# Altium PCB CME-USB-JTAG_Lite.PcbDoc
Units mil, origin at the board's own origin, x right, y up, seen from the top; angles counter-clockwise.
Board outline 2467 x 1344 mil, 2 copper layers (Top Layer, Bottom Layer); 46 components, 36 nets, 235 pads, 60 vias.
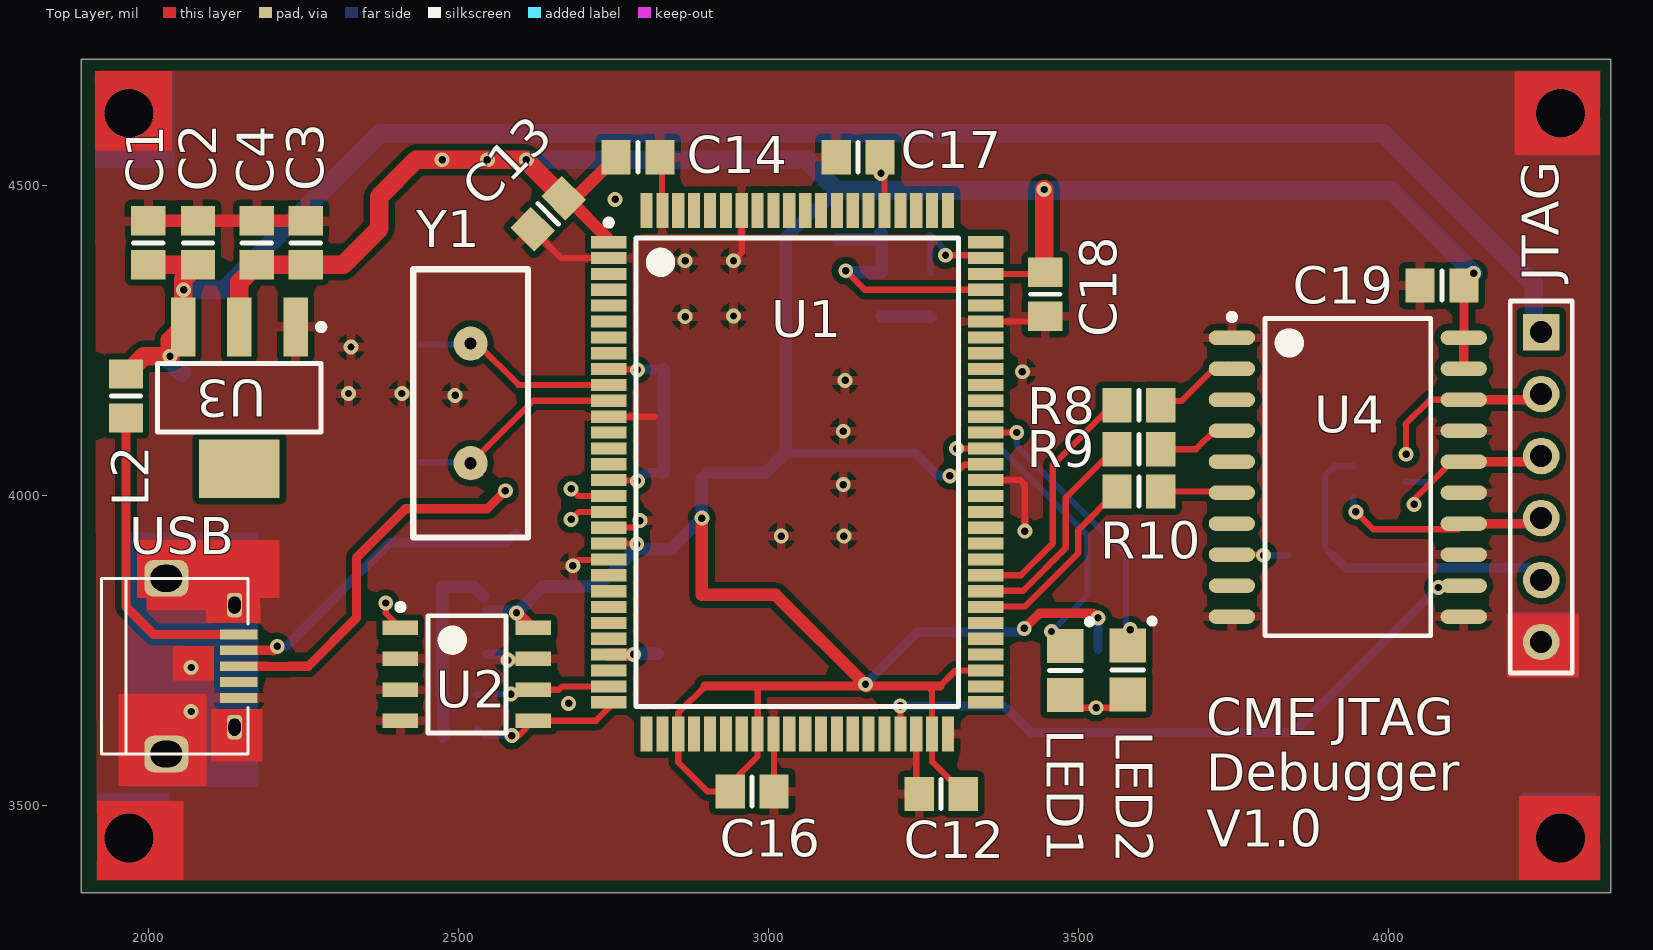
[diagram p0: Top Layer view]
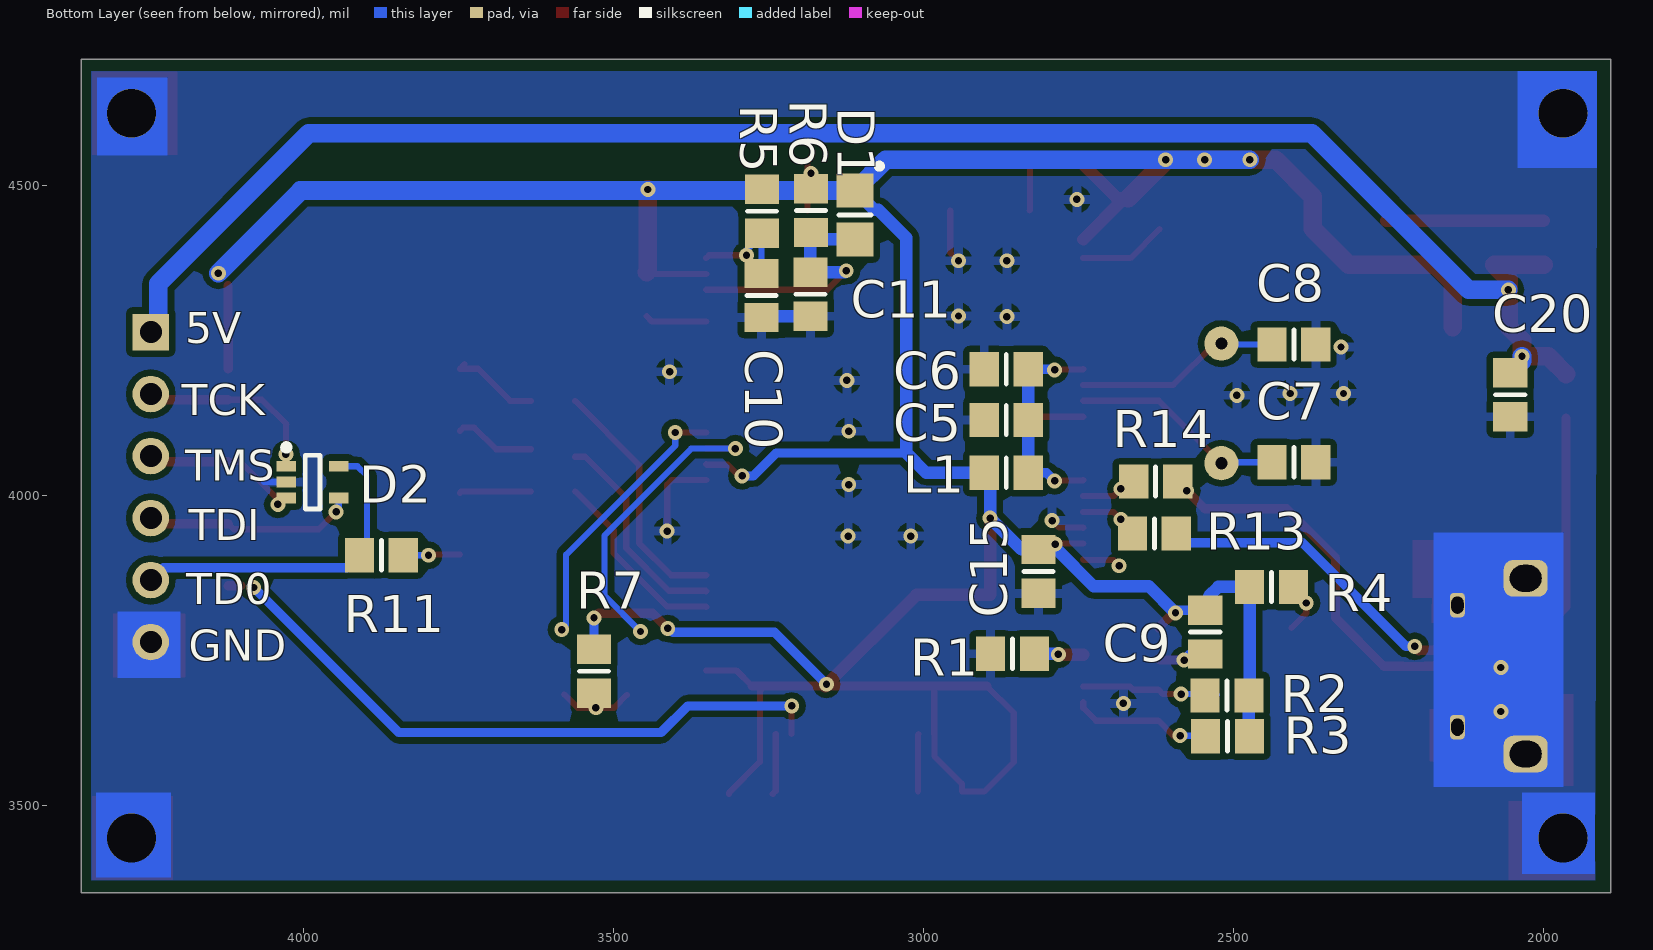
[diagram p1: Bottom Layer view, seen from below]

## Layer stack, top to bottom
Top Solder: solder mask 0.4, Solder Resist, Dk 3.5
Top Layer: signal copper 1.4
Dielectric 1: dielectric 12.6, FR-4, Dk 4.8
Bottom Layer: signal copper 1.4
Bottom Solder: solder mask 0.4, Solder Resist, Dk 3.5

## Board outline
1891,3360 4358,3360 4358,4704 1891,4704

## Design rules (kind name [scope] priority, off if disabled: settings)
Clearance [All] p1: gap=10 ignorepadtopadclearanceinfootprint=FALSE except(0: Arc-Hole Track-Hole SMDPad-Hole THPad-Hole Via-Hole Fill-Hole Poly-Hole Region-Hole Text-Hole)
DiffPairsRouting [All] p1: maxlimit=10 minlimit=10 mostfreqgap=10 toplayer_minwidth=10 toplayer_maxwidth=15 toplayer_prefwidth=15 bottomlayer_minwidth=10 bottomlayer_maxwidth=15 bottomlayer_prefwidth=15 maxuncoupledlength=500
PolygonConnect [All] p1: connectstyle=Relief reliefconductorwidth=15 reliefentries=4 polygonreliefangle="90 Angle" airgapwidth=10
RoutingVias [All] p1: holewidth=28 width=50 viastyle="Through Hole" minholewidth=28 minwidth=50 maxholewidth=28 maxwidth=50
SolderMaskExpansion [All] p1: expansion=4
Width [All] p1: maxlimit=50 minlimit=10 preferedwidth=10
29 further rules are at their usual default settings.

## Classes and differential pairs
differential pair USB-D: +USB-D_P -USB-D_N
differential pair USB: +USB_P -USB_N

## Components (designator, comment, footprint, x,y, rotation, side; value= is the part's Value field where it differs from the comment)
C1 "Cap" 6-0805_N 1999,4408 r270 top
C2 "Cap" 6-0805_N 2079,4408 r270 top
C3 "Cap" 6-0805_N 2253,4408 r270 top
C4 "Cap" 6-0805_N 2174,4408 r270 top
C5 "Cap" 6-0805_N 2866,4122 r180 bottom
C6 "Cap" 6-0805_N 2866,4204 r180 bottom
C7 "Cap" 6-0805_N 2402,4054 r0 bottom
C8 "Cap" 6-0805_N 2402,4244 r0 bottom
C9 "Cap" 6-0805_N 2545,3780 r270 bottom
C10 "Cap" 6-0805_N 3261,4323 r90 bottom
C11 "Cap" 6-0805_N 3182,4325 r90 bottom
C12 "Cap" 6-0805_N 3278,3519 r0 top
C13 "Cap" 6-0805_N 2644,4455 r45 top
C14 "Cap" 6-0805_N 2789,4546 r180 top
C15 "Cap" 6-0805_N 2814,3878 r90 bottom
C16 "Cap" 6-0805_N 2973,3523 r180 top
C17 "Cap" 6-0805_N 3144,4546 r0 top
C18 "Cap" 6-0805_N 3446,4325 r90 top
C19 "Cap" 6-0805_N 4086,4339 r0 top
C20 "Cap" 6-0805_N 2053,4163 r270 bottom
D1 "IN4148" 6-0805_Diode 3110,4453 r90 bottom
D2 "PESDXV4UG" SOT5N-65P210X110 3985,4022 r180 bottom
JTAG "Header 6" HDR1X6 4246,4264 r270 top
L1 "Inductor" 6-0805_N 2866,4037 r180 bottom
L2 "Inductor" 6-0805_N 1963,4161 r270 top
LED1 "LED2" 6-0805_Diode 3478,3718 r90 top
LED2 "LED2" 6-0805_Diode 3579,3719 r90 top
R1 "Res3" 6-0805_N 2856,3745 r180 bottom
R2 "Res3" 6-0805_N 2510,3678 r180 bottom
R3 "Res3" 6-0805_N 2509,3612 r180 bottom
R4 "Res3" 6-0805_N 2438,3853 r0 bottom
R5 "Res3" 6-0805_N 3260,4459 r270 bottom
R6 "Res3" 6-0805_N 3181,4460 r270 bottom
R7 "Res3" 6-0805_N 3531,3717 r90 bottom
R8 "Res3" 6-0805_N 3597,4146 r0 top
R9 "Res3" 6-0805_N 3597,4075 r0 top
R10 "Res3" 6-0805_N 3597,4007 r0 top
R11 "Res3" 6-0805_N 3874,3904 r180 bottom
R13 "Res3" 6-0805_N 2627,3939 r180 bottom
R14 "Res3" 6-0805_N 2625,4023 r180 bottom
U1 "CY7C68013A-100AXC" TQFP100N-65P1600X2200X160 3045.87,4038 r0 top locked
U2 "24LC64" SOP8N-127P600X200 2513,3712 r0 top
U3 "LM1117-3.3" SOT223_N 2146,4158 r270 top
U4 "74LVC244" SOP20N-127P1030X265 3934,4030 r0 top
USB "Header 9" MicroUSB 2049.43,3737.43 r90 top
Y1 "24MHZ" XTAL 2519,4149 r270 top

## Footprints (in the part's own frame and the unit in brackets; to place one, negate y for a bottom-side part, rotate by r counter-clockwise, add the part's x,y. Pads: shape width x height; smd on the part's side, far side on the other; paste and mask are expansions set on the pad)
6-0805_Diode [mm] "Chip Resistor, Body 2.0x1.2mm, IPC Low Density"
  rect 1.4x1.5 smd: 1(-1,0) 2(1,0)
  silkscreen extent 0,-1.1 2.1,0.65, body extent -1.07,-0.7 1.07,0.7, height 0.7
6-0805_N [mm] "Chip Resistor, Body 2.0x1.2mm, IPC Medium Density"
  rect 1.2x1.4 smd: 1(-0.9,0) 2(0.9,0)
  silkscreen extent 0,-0.6 0,0.6, body extent -1.07,-0.7 1.07,0.7, height 0.7
HDR1X6 [mm] "Connector; Header; 6 Position"
  rect 1.5x1.5 hole 0.9: 1(0,0)
  round 1.5 hole 0.9: 2(2.54,0) 3(5.08,0) 4(7.62,0) 5(10.16,0) 6(12.7,0)
  silkscreen extent -1.27,-1.27 13.97,1.27
MicroUSB [mm]
  round 0.635 on Top Overlay: 0(0.986,-3.776)
  rect 0.4x1.524 smd: 1(0.986,-2.426) 2(0.336,-2.426) 3(-0.314,-2.426) 4(-0.964,-2.426) 5(-1.614,-2.426)
  rrect50% 1.5x1.8 hole 1.1 slot 1.3 at 90 deg: 6(3.286,0.543) 7(-3.911,0.543)
  rrect50% 1x0.6 hole 0.5 slot 0.7 at 0 deg: 8(-2.812,-2.254) 9(2.188,-2.254)
  silkscreen extent -3.91,-2.81 3.29,3.19
SOP8N-127P600X200 [mm] "SOP, 8-Leads, Body 4.90x3.90mm, Pitch 1.27mm, IPC Medium Density"
  rect 1.45x0.6 smd: 1(-2.725,1.905) 2(-2.725,0.635) 3(-2.725,-0.635) 4(-2.725,-1.905) 5(2.725,-1.905) 6(2.725,-0.635) 7(2.725,0.635) 8(2.725,1.905)
  silkscreen extent -2.85,-2.4 1.6,2.88, body extent -2,-2.4 2,2.4, height 2
SOP20N-127P1030X265 [mm] "SOP, 20-Leads, Body 12.80x7.50mm, Pitch 1.27mm, IPC Medium Density"
  oval 1.9x0.6 smd: 1(-4.75,5.715) 2(-4.75,4.445) 3(-4.75,3.175) 4(-4.75,1.905) 5(-4.75,0.635) 6(-4.75,-0.635) 7(-4.75,-1.905) 8(-4.75,-3.175) 9(-4.75,-4.445) 10(-4.75,-5.715) 11(4.75,-5.715) 12(4.75,-4.445) 13(4.75,-3.175) 14(4.75,-1.905) 15(4.75,-0.635) 16(4.75,0.635) 17(4.75,1.905) 18(4.75,3.175) 19(4.75,4.445) 20(4.75,5.715)
  silkscreen extent -4.87,-6.5 3.4,6.69, body extent -3.8,-6.5 3.8,6.5, height 2.65
SOT5N-65P210X110 [mm] "SOT353, 5-Leads, Body 2.00x2.10mm, Pitch 0.65mm, IPC Medium Density"
  rect 0.8x0.45 smd: 1(-1.075,0.65) 2(-1.075,0) 3(-1.075,-0.65) 4(1.075,-0.65) 5(1.075,0.65)
  silkscreen extent -1.2,-1.1 0.3,1.55, body extent -0.67,-1.1 0.67,1.1, height 1.1
SOT223_N [mm] "SOT223, 4-Leads, Body 6.5x3.5mm, Pitch 2.3mm, Lead Span 7mm, IPC Medium Density"
  rect 2.4x1 smd: 1(-2.9,2.3) 2(-2.9,0) 3(-2.9,-2.3)
  rect 2.4x3.3 smd: 4(2.9,0)
  silkscreen extent -3.02,-3.35 1.4,3.48, body extent -1.85,-3.35 1.85,3.35, height 1.7
TQFP100N-65P1600X2200X160 [mm] "TQFP, 100-Leads, Body 14.00x20.00mm, Pitch 0.65mm, IPC Medium Density"
  rect 1.45x0.5 smd: 1(-7.725,9.425) 2(-7.725,8.775) 3(-7.725,8.125) 4(-7.725,7.475) 5(-7.725,6.825) 6(-7.725,6.175) 7(-7.725,5.525) 8(-7.725,4.875) 9(-7.725,4.225) 10(-7.725,3.575) 11(-7.725,2.925) 12(-7.725,2.275) 13(-7.725,1.625) 14(-7.725,0.975) 15(-7.725,0.325) 16(-7.725,-0.325) 17(-7.725,-0.975) 18(-7.725,-1.625) 19(-7.725,-2.275) 20(-7.725,-2.925) 21(-7.725,-3.575) 22(-7.725,-4.225) 23(-7.725,-4.875) 24(-7.725,-5.525) 25(-7.725,-6.175) 26(-7.725,-6.825) 27(-7.725,-7.475) 28(-7.725,-8.125) 29(-7.725,-8.775) 30(-7.725,-9.425) 51(7.725,-9.425) 52(7.725,-8.775) 53(7.725,-8.125) 54(7.725,-7.475) 55(7.725,-6.825) 56(7.725,-6.175) 57(7.725,-5.525) 58(7.725,-4.875) 59(7.725,-4.225) 60(7.725,-3.575) 61(7.725,-2.925) 62(7.725,-2.275) 63(7.725,-1.625) 64(7.725,-0.975) 65(7.725,-0.325) 66(7.725,0.325) 67(7.725,0.975) 68(7.725,1.625) 69(7.725,2.275) 70(7.725,2.925) 71(7.725,3.575) 72(7.725,4.225) 73(7.725,4.875) 74(7.725,5.525) 75(7.725,6.175) 76(7.725,6.825) 77(7.725,7.475) 78(7.725,8.125) 79(7.725,8.775) 80(7.725,9.425)
  rect 0.5x1.45 smd: 31(-6.175,-10.725) 32(-5.525,-10.725) 33(-4.875,-10.725) 34(-4.225,-10.725) 35(-3.575,-10.725) 36(-2.925,-10.725) 37(-2.275,-10.725) 38(-1.625,-10.725) 39(-0.975,-10.725) 40(-0.325,-10.725) 41(0.325,-10.725) 42(0.975,-10.725) 43(1.625,-10.725) 44(2.275,-10.725) 45(2.925,-10.725) 46(3.575,-10.725) 47(4.225,-10.725) 48(4.875,-10.725) 49(5.525,-10.725) 50(6.175,-10.725) 81(6.175,10.725) 82(5.525,10.725) 83(4.875,10.725) 84(4.225,10.725) 85(3.575,10.725) 86(2.925,10.725) 87(2.275,10.725) 88(1.625,10.725) 89(0.975,10.725) 90(0.325,10.725) 91(-0.325,10.725) 92(-0.975,10.725) 93(-1.625,10.725) 94(-2.275,10.725) 95(-2.925,10.725) 96(-3.575,10.725) 97(-4.225,10.725) 98(-4.875,10.725) 99(-5.525,10.725) 100(-6.175,10.725)
  silkscreen extent -7.85,-9.6 6.6,10.35, body extent -7,-10 7,10, height 1.6
XTAL [mm]
  round 1.4 hole 0.5: 1(-2.45,0) 2(2.45,0)
  silkscreen extent -5.5,-2.35 5.5,2.35

## Part data
C1 C2 C3 C4 C5 C6 C7 C8 C9 C10 C11 C12 C13 C14 C15 C16 C17 C18 C19 C20: "Capacitor"
D1: library part Diode, "Default Diode"
D2: library part "ESD_Diode x4"
JTAG: "Header, 6-Pin"
LED1 LED2: "Typical RED, GREEN, YELLOW, AMBER GaAs LED"
R1 R2 R3 R4 R5 R6 R7 R8 R9 R10 R11 R13 R14: "Resistor"
U2: library part 24XXxx
U3: library part LM1117
U4: library part 74xx244
USB: "Header, 9-Pin"
Y1: library part XTAL, "Crystal Oscillator"

## Free pads (board coordinates)
  round 78.74 hole 78.74: 2(4277,4617) 3(4277,3448) 4(1968,3448) 5(1968,4617)

## Via types
v1: diameter 24, hole 12, Top Layer to Bottom Layer, 60 vias

## Nets (pads, with @x,y where several pads share a name; then routed paths per layer and width w, separated by ;. In a path a pad name is that pad's centre, name@x,y a point inside that pad or via, vN(x,y) a via of type N, cw(c..) or ccw(c..) an arc to the next point about the centre after c; other vN are vias at no path point)
3V3: C3.2 C4.2 C9.1 C12.2 C13.2 C14.2 C15.2 C16.2 C17.2 C18.2 C19.2 D1.2 L1.1 R2.2 R3.2 R4.2 R5.1 R6.1 R7.2 U1.1 U1.20 U1.33 U1.38 U1.49 U1.53 U1.66 U1.78 U1.85 U2.8 U3.2 U4.19 U4.20 | length 7138.4
  Top Layer w10: U1.20 2786.16,3922.84 v1(2787,3922) ; 2897.17,3693 2853.94,3649.76 U1.33 2853.94,3570.06 2901,3523 C16.2 2937.57,3535.57 2981.89,3579.89 U1.38 2982,3615.87 2982,3693 ; C17.2 3186.61,4538.82 U1.85 ; 3255,3693 3263.39,3684.61 U1.49 3263.39,3570.58 3313.43,3520.53 C12.2 ; 3276,3693 3301.12,3718.12 U1.53 ; v1(3292,4032) 3297.18,4032 3315.23,4050.05 3349.25,4050.05 U1.66 ; U1.78 3443.45,4357.88 C18.2 ; U4.20 U4.20@4121.43,4255.43
  Top Layer w15: v1(2593,3811) 2596.28,3811 U2.8 ; 2897.17,3693 2982,3693 3158,3693 3255,3693 3276,3693 ; v1(3412,3786) 3436.5,3810.5 3523.5,3810.5 v1(3531,3803) ; U4.19 U4.20 ; U4.20@4121.43,4255.43 C19.2
  Top Layer w20: C13.2 C13.2@2674.99,4480.06 ; U1.1@2741.73,4413.31 C13.2@2674.99,4480.06 ; C14.2 2687.62,4480.06 C13.2@2674.99,4480.06 ; v1(2892,3964) 2892,3840 3011,3840 v1@3158,3693
  Top Layer w30: U3.2 2146,4344.57 C4.2 C3.2 2313.57,4372.57 2371.57,4430.57 2371.57,4482.57 2431,4542 v1(2473,4542) 2607.11,4542 C13.2 ; v1(3444,4494) 3444,4362.43 C18.2
  Bottom Layer w10: L1.1@2892,4027.57 L1.1
  Bottom Layer w15: C9.1 2588.57,3815.43 v1(2593,3811) ; 3027,4069 3237,4069 3274,4032 v1(3292,4032) ; v1(3156,3696) 3240,3780 3404,3780 v1@3411,3787 ; R7.2 v1(3531,3803)
  Bottom Layer w20: R3.2 2474.57,3613 R2.2 2473.43,3679.13 R4.2 2524,3853 C9.1@2539,3838 ; v1(2593,3811) 2636,3854 2725,3854 2784.43,3913.43 C15.2 2841.43,3913.43 v1(2892,3964) L1.1@2892,4027.57 ; L1.1 2995,4037 3027,4069 3027,4416 3072.19,4461.19 3078.82,4461.19 D1.2 3113.06,4495.43 R6.1 3259,4495.43 R5.1
  Bottom Layer w30: v1(2473,4542) 3060.37,4542 D1.2 4004.63,4492.37 4004.63,4491.37 v1(4137,4359)
  other v1: 3181,4520 2546,4542 2609,4542
4TCK_OUT: U1.72
A3V3: C5.2 C6.2 L1.2 U1.9 U1.16 | length 351.5
  Top Layer w10: U1.16 2742.48,4024.46 2787.54,4024.46 v1(2788,4024) ; U1.9 2742.48,4203.59 2787.41,4203.59 v1(2788,4203)
  Bottom Layer w10: v1(2788,4203) v1@2789,4204
  Bottom Layer w15: v1(2788,4024) 2801,4037 L1.2 ; v1@2789,4204 C6.2
  Bottom Layer w20: L1.2 C5.2 C6.2
ECLK_EN: U1.73
EFUSE_EN: U1.74
GND: C1.1 C2.1 C3.1 C4.1 C5.1 C6.1 C7.1 C8.1 C9.2 C10.1 C11.1 C12.1 C13.1 C14.1 C15.1 C16.1 C17.1 C18.1 C19.1 C20.2 D2.2 JTAG.6 pad.2 pad.3 pad.4 pad.5 R1.1 U1.2 U1.12 U1.19 U1.21 U1.39 U1.48 U1.50 U1.65 U1.75 U1.94 U1.99 U2.2 U2.3 U2.4 U2.7 U3.1 U4.1 U4.10 U4.11 U4.13 U4.15 U4.17 USB.5 USB.6 USB.7 USB.8 USB.9 | length 1390
  Top Layer w10: C13.1 2665.42,4383.47 U1.2 ; v1(2684,3887) 2693.5,3896.5 2740.98,3896.5 U1.21 ; U1.19 2741.73,3949 2781,3949 v1(2792,3960) ; U1.12 2815.43,4127.57 2816,4127 ; C14.1 2827.6,4542.83 2827.6,4460.99 U1.99 ; v1(2943,4379) 2956.3,4392.3 U1.94 ; U1.39 3008.23,3615.01 3008.23,3523.2 C16.1 ; U1.48 3237.8,3523.77 C12.1 ; U1.65 3405.8,4025.2 3413,4018 v1(3413,3943) ; U1.75 3437.54,4281.11 C18.1
  Top Layer w15: v1(2579,3735) 2618.28,3735 U2.7
  Top Layer w20: C1.1 C2.1 C4.1 C3.1
  Bottom Layer w10: D2.2 4063,4022
  Bottom Layer w15: C9.2 2569.43,3744.57 v1(2579,3735)
  Bottom Layer w20: C11.1 3259,4289.57 C10.1
  other v1: 2068,3652 2677,3665 2068,3723 3020,3935 3121,3935 3120,4018 3120,4104 2494,4162 2322,4165 2408,4165 3123,4186 3409,4200 2326,4240 2865,4289 2943,4290 2865,4379 2752,4478
IFCLK: U1.26
LED1: LED1.2 U1.67 | length 495.2
  Top Layer w10: v1(3303,4076) 3349.61,4076 U1.67
  Bottom Layer w10: v1(3303,4076) 3374,4076 3514,3936 3514,3839 v1(3456,3781)
LED2: LED2.2 U1.68 | length 443.8
  Top Layer w10: U1.68 v1(3400,4102)
  Bottom Layer w10: v1(3400,4102) 3400,4081 3575.94,3905.06 3575.94,3791.06 v1(3583,3784)
NetC7_2: C7.2 U1.11 Y1.2 | length 346.6
  Top Layer w10: Y1.2 2619.61,4153.16 U1.11
  Bottom Layer w10: C7.2 2517.54,4054 Y1.2
NetC8_2: C8.2 U1.10 Y1.1 | length 332.5
  Top Layer w10: Y1.1 2529.54,4245.46 2596.25,4178.75 U1.10
  Bottom Layer w10: C8.2 2517.54,4244 Y1.1
NetL2_2: L2.2 USB.1 | length 505
  Top Layer w15: L2.2 1963,3821 2007.74,3776.26 USB.1
NetLED1_1: LED1.1 LED2.1 R7.1 | length 118.5
  Top Layer w10: LED1.1 3498.63,3658 v1(3528,3658) 3557.37,3658 LED2.1
NetR1_2: R1.2 U1.27 | length 79.4
  Top Layer w20: U1.27 2781.71,3743.71 v1(2782,3744)
  Bottom Layer w20: v1(2782,3744) 2783,3745 R1.2
NetR4_1: R4.1 U2.1 | length 49.8
  Top Layer w10: v1(2382,3827) 2382,3810.72 U2.1
NetR8_2: R8.2 U4.2 | length 146
  Top Layer w10: R8.2@3632.43,4153 3666,4153 3718,4205 U4.2 U4.2@3739.99,4212
NetR9_2: R9.2 U4.4 | length 131.1
  Top Layer w10: R9.2 3689,4075 3724,4110 3741.99,4110 U4.4
NetR10_2: R10.2 U4.6 | length 115.4
  Top Layer w10: R10.2 3744.99,4007 U4.6
NetR11_2: R11.2 U4.8 | length 92
  Top Layer w10: U4.8 3797,3905 v1(3798,3904)
  Bottom Layer w10: v1(3798,3904) R11.2
RESET: C11.2 D1.1 R6.2 U1.77 | length 437.9
  Top Layer w10: v1(3124,4363) 3154.71,4332.29 U1.77
  Bottom Layer w20: D1.1 3170.06,4413.63 R6.2 3182,4423.57 C11.2 3126.57,4360.43 v1(3124,4363)
SCL: R2.1 U1.29 U2.6 | length 220.9
  Top Layer w10: v1(2584,3680) 2613.28,3680 U2.6 2661,3687 2666.53,3692.53 U1.29
  Bottom Layer w10: R2.1@2526.43,3679 2545,3679 2546,3680 v1(2584,3680)
SDA: R3.1 U1.30 U2.5 | length 244
  Top Layer w10: v1(2585.57,3613) 2596.28,3613 U2.5 2721,3637 2741.73,3657.73 U1.30
  Bottom Layer w10: R3.1@2530,3624 2541,3613 v1(2585.57,3613)
TCK: D2.1 JTAG.2 U4.18 | length 287.7
  Top Layer w10: v1(4028,4067) 4028,4114 4027,4115 4067,4155 U4.18
  Top Layer w15: U4.18 4237,4155 JTAG.2
TCK_OUT: R8.1 U1.59 | length 402.2
  Top Layer w10: U1.59 3406.66,3871.66 3458,3923 3458,4049.43 R8.1@3561.57,4153
TDI: D2.4 JTAG.4 U4.14 | length 342.3
  Top Layer w10: v1(3947,3974) 3975,3946 4112.01,3946 U4.14
  Top Layer w15: U4.14 4237,3955 JTAG.4
  Bottom Layer w10: D2.4 3942.68,3978.32 v1(3947,3974)
TDI_OUT: R10.1 U1.57 | length 310.5
  Top Layer w10: U1.57 3350.75,3821.23 3412.8,3821.23 3499,3907.43 3499,3944.43 R10.1
TDO: U1.47 U4.12 | length 1048.1
  Top Layer w10: v1(3212,3661) 3212.2,3660.8 U1.47
  Top Layer w15: U4.12@4101,3855 U4.12
  Bottom Layer w15: v1(3212,3661) 3380,3661 3423,3618 3846,3618 v1(4080,3852)
TDO_IN: D2.5 JTAG.5 R11.1 | length 538.4
  Bottom Layer w10: R11.1 3897,3916.43 3897,4032 3912.59,4047.59 D2.5
  Bottom Layer w15: R11.1 3929.43,3884 4226,3884 JTAG.5
TMS: D2.3 JTAG.3 U4.16 | length 242
  Top Layer w10: v1(4041,3986) 4041,3994 4102,4055 U4.16
  Top Layer w15: U4.16 4237,4055 JTAG.3
TMS_OUT: R9.1 U1.58 | length 348.9
  Top Layer w10: U1.58 3350.75,3846.82 3410.1,3846.82 3479,3915.72 3479,3996.83 3545.17,4063 R9.1@3561.57,4063
USB-D_N: R13.1 U1.18 | length 65.7
  Top Layer w10: v1(2681,3962) 2693.02,3974.02 U1.18
USB-D_P: R14.1 U1.17 | length 65.4
  Top Layer w10: v1(2681,4011) 2692.39,3999.61 U1.17
USB_N: R13.2 USB.2 | length 526.3
  Top Layer w15: USB.2 2199.19,3750.67 2200.43,3749.43 2207,3756 v1(2207,3757)
  Bottom Layer w15: v1(2207,3757) 2221,3757 2388,3924 2576.57,3924 R13.2
USB_P: R14.2 USB.3 | length 604.6
  Top Layer w15: USB.3 2145.15,3724.86 2189.64,3724.86 2190.07,3724.43 2226.15,3724.43 2226.58,3724.86 2256.86,3724.86 2335,3803 2335,3900 2414,3979 2546,3979 v1(2575,4008)
VUSB: C1.2 C2.2 C20.1 JTAG.1 L2.1 U3.3 | length 2829.9
  Top Layer w30: L2.1 1991.57,4225 v1(2034,4225) 2034,4250.72 U3.3 2055.45,4349.02 C2.2 C1.2
  Bottom Layer w30: v1(2034,4225) 2034,4217.43 C20.1 ; v1(2056,4332) 2120,4332 2373,4585 3991,4585 4234,4342 4234,4276 JTAG.1
WAKEUP: C10.2 R5.2 U1.79 | length 171.8
  Top Layer w10: v1(3285,4388) 3345.47,4388 U1.79
  Bottom Layer w10: R5.2@3260,4421 R5.2@3261,4420 ; C10.2 R5.2@3261,4420 ; v1(3285,4388) 3285,4396 R5.2@3261,4420
pads on no net: U1.3 U1.4 U1.5 U1.6 U1.7 U1.8 U1.13 U1.14 U1.15 U1.22 U1.23 U1.24 U1.25 U1.28 U1.31 U1.32 U1.34 U1.35 U1.36 U1.37 U1.40 U1.41 U1.42 U1.43 U1.44 U1.45 U1.46 U1.51 U1.52 U1.54 U1.55 U1.56 U1.60 U1.61 U1.62 U1.63 U1.64 U1.69 U1.70 U1.71 U1.76 U1.80 U1.81 U1.82 U1.83 U1.84 U1.86 U1.87 U1.88 U1.89 U1.90 U1.91 U1.92 U1.93 U1.95 U1.96 U1.97 U1.98 U1.100 U3.4 U4.3 U4.5 U4.7 U4.9 USB.0 USB.4

## Polygon pours and split planes (outlines as drawn)
GND on Top Layer "GND_L01_P000" (solid, remove dead copper, pour order 0): 1913,4668 1912.96,4686 4341,4685.99 4341,3380 1916.01,3380
GND on Bottom Layer "GND_L02_P002" (solid, remove dead copper, pour order 2): 1913.04,4685 4342,4685 4342,3380 1916,3380 1916,3385

## Other copper
Top Layer:
  rectangle net GND: 4190,3707 4307,3810
  rectangle net GND: 2092,3795 2180,3825
  rectangle net GND: 1996.49,3816.06 2179.49,3842.06
  rectangle net GND: 1981,3835 2211,3929
  rectangle net GND: 2039,3702.06 2104.93,3758
  rectangle net GND: 2100,3571 2183,3656
  rectangle net GND: 1951,3532 2093,3680
  rectangle net GND: 1916.01,3380 2056,3508
  rectangle net GND: 4210,3380 4341,3516
  rectangle net GND: 4203,4550 4341,4684
  rectangle net GND: 1913,4557 2037,4685
Bottom Layer:
  rectangle net GND: 4198,3706 4300,3813
  rectangle net GND: 1967,3530 2177,3941
  rectangle net GND: 4213,3384 4334,3521
  rectangle net GND: 4219,4549 4333,4675
  rectangle net GND: 1913,4529 2041,4685
  rectangle net GND: 1916,3390 2034,3521

## Silkscreen, mask and mechanical layers (free items; w line width, h text height)
Top Overlay:
  text "CME JTAG / Debugger / V1.0" at 3706,3434 h60
Bottom Overlay:
  text "5V" at 4190,4246 h50
  text "TCK" at 4196,4130 h50
  text "TMS" at 4190,4024 h50
  text "TDI" at 4185,3928 h50
  text "TD0" at 4189,3825 h50
  text "GND" at 4185,3734 h50
Mechanical 1:
  rectangle: 1903,3378 4345,4679
  lines w30: 1918,3399 1918,4563 4324,4563 4324,3399 1918,3399